# Altium PCB breakout_board.PcbDoc
Units mil, origin at the board's own origin, x right, y up, seen from the top; angles counter-clockwise.
Board outline 2000 x 900 mil, 2 copper layers (Top Layer, Bottom Layer), stack 61.855 mil thick; 38 components, 37 nets, 161 pads, 93 vias.
Unrouted connection lines stored in the file: 33.
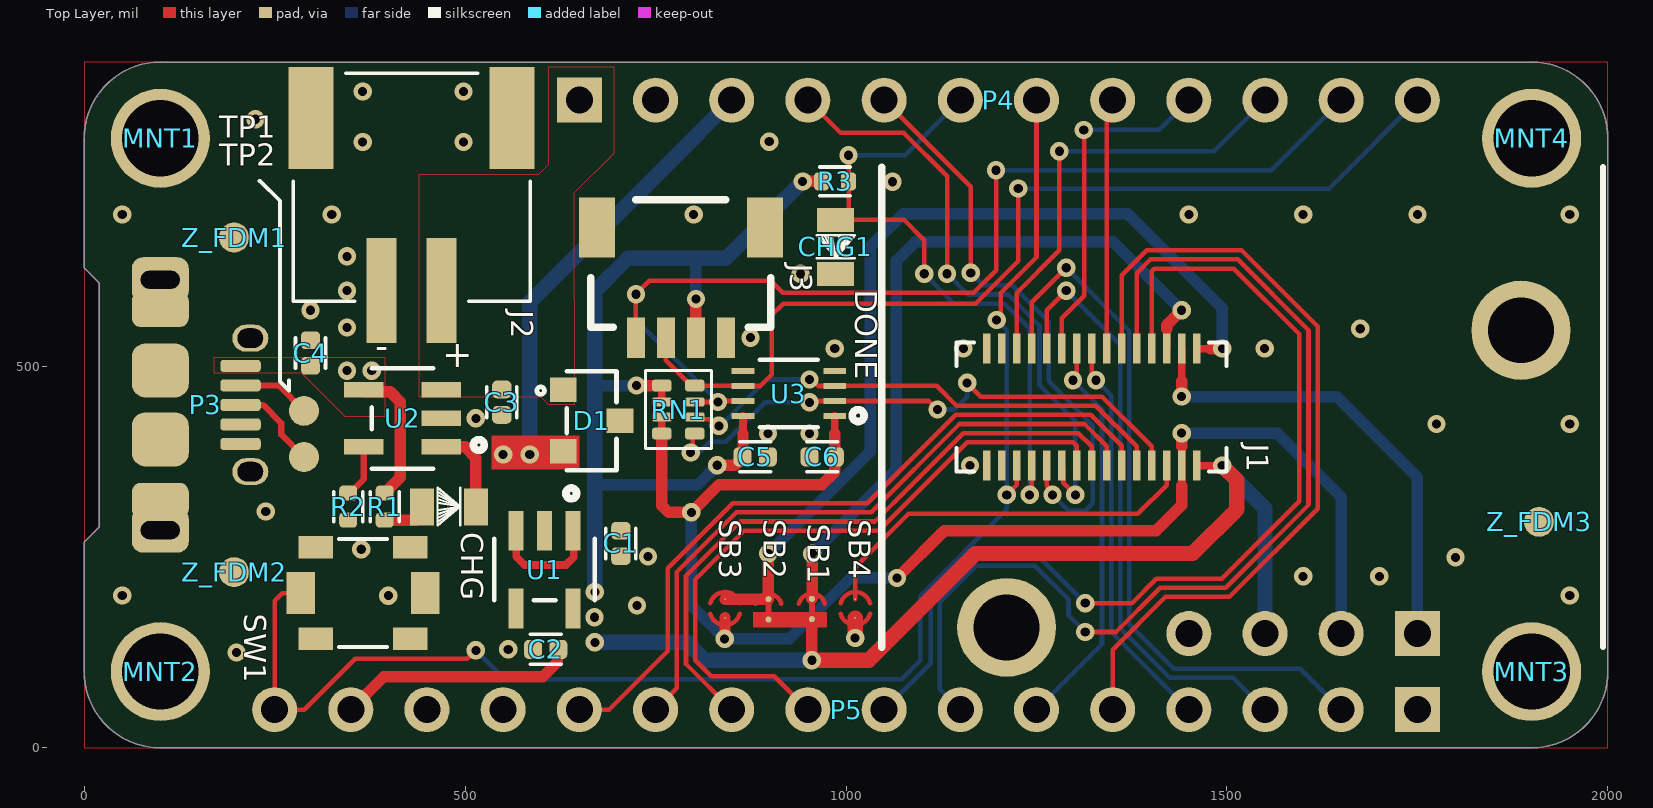
[diagram p0: Top Layer view]
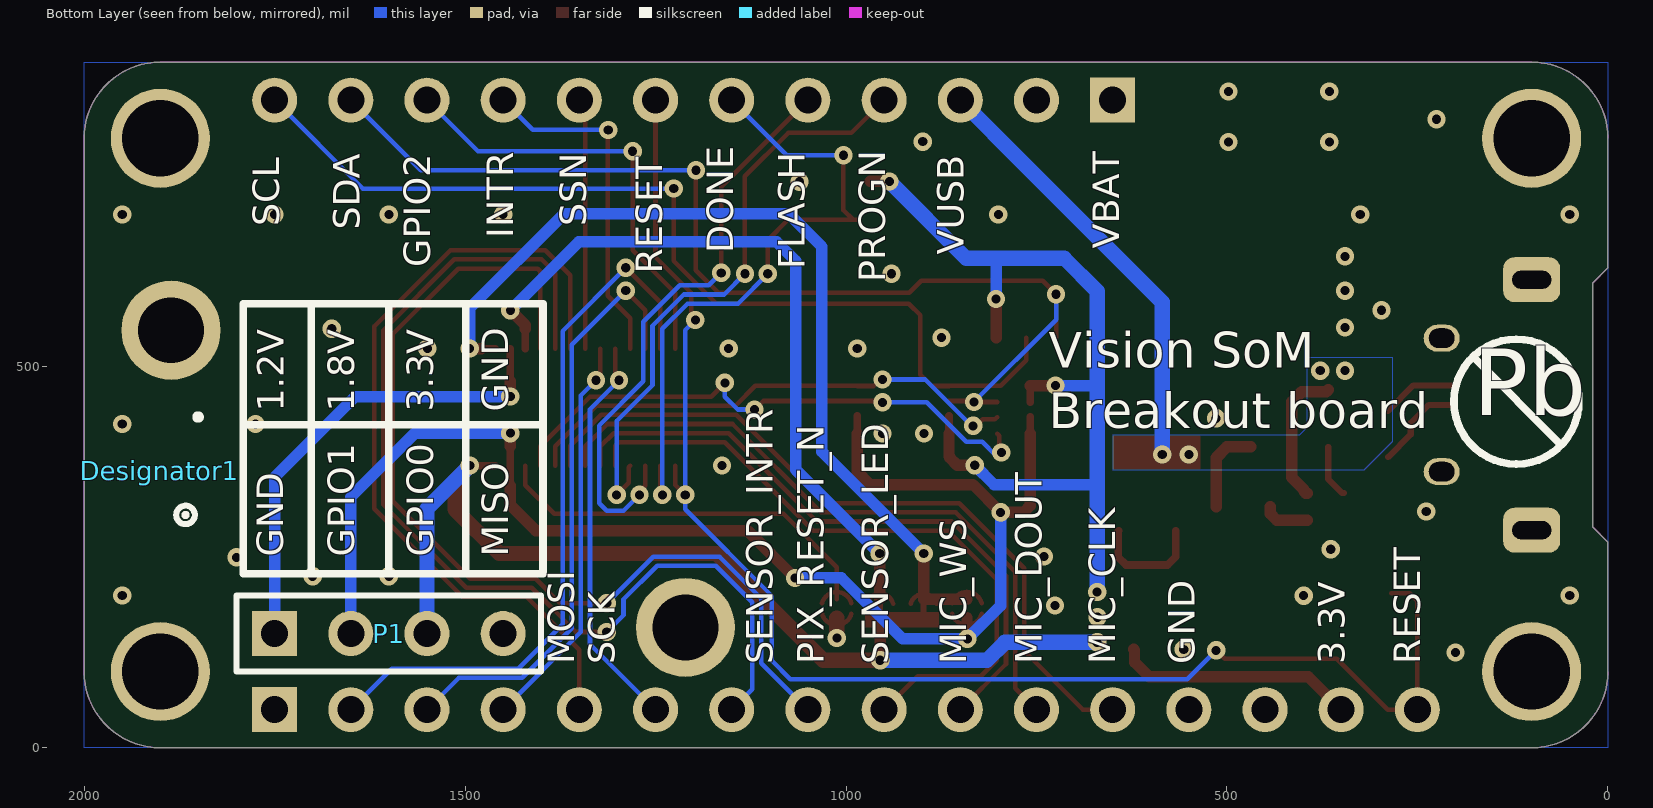
[diagram p1: Bottom Layer view, seen from below]

## Layer stack, top to bottom
Top Solder: solder mask 0.4, Solder Resist, Dk 3.5
Top Layer: signal copper 1.4
Dielectric 1: dielectric 59.0551, FR-4, Dk 4.8
Bottom Layer: signal copper 1.4
Bottom Solder: solder mask 0.4, Solder Resist, Dk 3.5

## Board outline
0,100 0,270 20,290 20,610 0,630 0,800 cw(c100,800) 100,900 1900,900 cw(c1900,800) 2000,800 2000,100 cw(c1900,100) 1900,0 100,0 cw(c100,100)

## Design rules (kind name [scope] priority, off if disabled: settings)
AssemblyTestPointUsage [All] p0: scope1count=1 scope1_0_kind=Board scope1_0_value=Board scope2count=1 scope2_0_kind=Board scope2_0_value=Board commentlength=0
AssemblyTestpoint [All] p0: scope1count=1 scope1_0_kind=Board scope1_0_value=Board scope2count=1 scope2_0_kind=Board scope2_0_value=Board commentlength=0
Clearance [All] p0: scope1count=1 scope1_0_kind=Board scope1_0_value=Board scope2count=1 scope2_0_kind=Board scope2_0_value=Board commentlength=0 gap=6
Clearance [All] p1: gap=6 ignorepadtopadclearanceinfootprint=FALSE except(8: Arc-Poly THPad-Poly; 10: Fill-Poly Poly-Poly Poly-Region Poly-Hole)
ComponentClearance ComponentClearance_Logo [All] p0: scope1count=1 scope1_0_kind=Component scope1_0_value=P1 scope2count=1 scope2_0_kind=Component scope2_0_value=SYM commentlength=0 gap=0 collisioncheckmode=3
ComponentClearance [All] p0: scope1count=1 scope1_0_kind=Board scope1_0_value=Board scope2count=1 scope2_0_kind=Board scope2_0_value=Board commentlength=0 gap=10 collisioncheckmode=3
ComponentClearance ComponentClearance_Logo [InComponent('P1') vs InComponent('SYM')] p1: gap=0 collisioncheckmode=3 verticalgap=0 showdistances=FALSE
ComponentClearance [All] p2: gap=10 collisioncheckmode=3 verticalgap=10 showdistances=FALSE
DiffPairsRouting [All] p0: scope1count=1 scope1_0_kind=Board scope1_0_value=Board scope2count=1 scope2_0_kind=Board scope2_0_value=Board commentlength=0
FabricationTestPointUsage [All] p0: scope1count=1 scope1_0_kind=Board scope1_0_value=Board scope2count=1 scope2_0_kind=Board scope2_0_value=Board commentlength=0 valid=0 allowmultiple=FALSE
FabricationTestpoint [All] p0: scope1count=1 scope1_0_kind=Board scope1_0_value=Board scope2count=1 scope2_0_kind=Board scope2_0_value=Board commentlength=0 side=3 testpointundercomponent=TRUE minsize=40 maxsize=100 preferedsize=60 minholesize=0 maxholesize=40 preferedholesize=32 testpointgrid=1
FanoutControl Fanout_BGA [All] p0 off: scope1count=1 scope1_0_kind=Board scope1_0_value=Board scope2count=1 scope2_0_kind=Board scope2_0_value=Board commentlength=69 // Protel DXP Scope 1 Expression Was: IsBGA   Fanout_BGA (Default Rule)
FanoutControl Fanout_LCC [All] p0 off: scope1count=1 scope1_0_kind=Board scope1_0_value=Board scope2count=1 scope2_0_kind=Board scope2_0_value=Board commentlength=69 // Protel DXP Scope 1 Expression Was: IsLCC   Fanout_LCC (Default Rule)
FanoutControl Fanout_SOIC [All] p0 off: scope1count=1 scope1_0_kind=Board scope1_0_value=Board scope2count=1 scope2_0_kind=Board scope2_0_value=Board commentlength=71 // Protel DXP Scope 1 Expression Was: IsSOIC   Fanout_SOIC (Default Rule)
FanoutControl Fanout_Small [All] p0 off: scope1count=1 scope1_0_kind=Board scope1_0_value=Board scope2count=1 scope2_0_kind=Board scope2_0_value=Board commentlength=84 // Protel DXP Scope 1 Expression Was: (CompPinCount < 5)   Fanout_Small (Default Rule)
FanoutControl Fanout_Default [All] p0: scope1count=1 scope1_0_kind=Board scope1_0_value=Board scope2count=1 scope2_0_kind=Board scope2_0_value=Board commentlength=30 // Fanout_Default (Default Rule)
Height [All] p0: scope1count=1 scope1_0_kind=Board scope1_0_value=Board scope2count=1 scope2_0_kind=Board scope2_0_value=Board commentlength=0
HoleSize [All] p0: scope1count=1 scope1_0_kind=Board scope1_0_value=Board scope2count=1 scope2_0_kind=Board scope2_0_value=Board commentlength=0 absolutevalues=TRUE maxlimit=100 minlimit=1 maxpercent=80.000 minpercent=20.000
HoleToHoleClearance [All] p0: scope1count=1 scope1_0_kind=Board scope1_0_value=Board scope2count=1 scope2_0_kind=Board scope2_0_value=Board commentlength=0
LayerPairs [All] p0: scope1count=1 scope1_0_kind=Board scope1_0_value=Board scope2count=1 scope2_0_kind=Board scope2_0_value=Board commentlength=0 enforce=TRUE
MinimumSolderMaskSliver [All] p0: scope1count=1 scope1_0_kind=Board scope1_0_value=Board scope2count=1 scope2_0_kind=Board scope2_0_value=Board commentlength=0
MinimumSolderMaskSliver [All] p1: minsoldermaskwidth=2
NetAntennae [All] p0: scope1count=1 scope1_0_kind=Board scope1_0_value=Board scope2count=1 scope2_0_kind=Board scope2_0_value=Board commentlength=0
PasteMaskExpansion [All] p0: scope1count=1 scope1_0_kind=Board scope1_0_value=Board scope2count=1 scope2_0_kind=Board scope2_0_value=Board commentlength=0 expansion=0
PlaneClearance [All] p0: scope1count=1 scope1_0_kind=Board scope1_0_value=Board scope2count=1 scope2_0_kind=Board scope2_0_value=Board commentlength=0 clearance=20
PlaneConnect [All] p0: scope1count=1 scope1_0_kind=Board scope1_0_value=Board scope2count=1 scope2_0_kind=Board scope2_0_value=Board commentlength=0 planeconnectstyle=Relief reliefexpansion=20 reliefentries=4 reliefconductorwidth=10 reliefairgap=10
PolygonConnect PolygonConnect_PWR [All] p0 off: scope1count=1 scope1_0_kind=Board scope1_0_value=Board scope2count=1 scope2_0_kind=Board scope2_0_value=Board commentlength=69 connectstyle=Direct reliefconductorwidth=10 reliefentries=4 polygonreliefangle="90 Angle" // Protel DXP Scope 1 Expression Was: InNet('VUSB') or InNet('VBAT')
PolygonConnect [All] p0: scope1count=1 scope1_0_kind=Board scope1_0_value=Board scope2count=1 scope2_0_kind=Board scope2_0_value=Board commentlength=0 connectstyle=Relief reliefconductorwidth=8 reliefentries=4 polygonreliefangle="90 Angle"
PolygonConnect PolygonConnect_PWR [InNet('VUSB') or InNet('VBAT')] p1: connectstyle=Direct reliefconductorwidth=10 reliefentries=4 polygonreliefangle="90 Angle" airgapwidth=10
PolygonConnect [All] p2: thpad.connectstyle=Relief thpad.reliefconductorwidth=8 thpad.reliefentries=4 thpad.polygonreliefangle="90 Angle" thpad.airgapwidth=8 smdpad.connectstyle=Direct smdpad.reliefconductorwidth=10 smdpad.reliefentries=4 smdpad.polygonreliefangle="90 Angle" smdpad.airgapwidth=10 via.connectstyle=Direct via.reliefconductorwidth=10 via.reliefentries=4 via.polygonreliefangle="90 Angle" via.airgapwidth=10
RoomDefinition breakout_board [All] p0 off: scope1count=1 scope1_0_kind=ComponentClass scope1_0_value=breakout_board scope2count=1 scope2_0_kind=Board scope2_0_value=Board commentlength=0 region_x1=82350000 region_y1=650000 region_x2=88400000 region_y2=2400000 confinementstyle=ConfineIn
RoomDefinition breakout_board [InComponentClass('breakout_board')] p1 off: confinementstyle=ConfineIn formatcopy=TRUE lockcomponents=FALSE outline 7110,-1635 7715,-1635 7715,-1460 7110,-1460
RoutingCorners [All] p0: scope1count=1 scope1_0_kind=Board scope1_0_value=Board scope2count=1 scope2_0_kind=Board scope2_0_value=Board commentlength=0 cornerstyle=45-Degree minsetback=100 maxsetback=100
RoutingLayers [All] p0: scope1count=1 scope1_0_kind=Board scope1_0_value=Board scope2count=1 scope2_0_kind=Board scope2_0_value=Board commentlength=0 top layer=Automatic bottom layer=Automatic
RoutingPriority [All] p0: scope1count=1 scope1_0_kind=Board scope1_0_value=Board scope2count=1 scope2_0_kind=Board scope2_0_value=Board commentlength=0
RoutingTopology [All] p0: scope1count=1 scope1_0_kind=Board scope1_0_value=Board scope2count=1 scope2_0_kind=Board scope2_0_value=Board commentlength=0 topology=Shortest
RoutingVias [All] p0: scope1count=1 scope1_0_kind=Board scope1_0_value=Board scope2count=1 scope2_0_kind=Board scope2_0_value=Board commentlength=0 holewidth=12 width=24 viastyle="Through Hole" minholewidth=10 minwidth=20 maxholewidth=28 maxwidth=50
RoutingVias [All] p1: holewidth=12 width=24 viastyle="Through Hole" minholewidth=10 minwidth=20 maxholewidth=28 maxwidth=50
ShortCircuit [All] p0: scope1count=1 scope1_0_kind=Board scope1_0_value=Board scope2count=1 scope2_0_kind=Board scope2_0_value=Board commentlength=0 allowed=FALSE
SilkToBoardRegionClearance [All] p0: scope1count=1 scope1_0_kind=Board scope1_0_value=Board scope2count=1 scope2_0_kind=Board scope2_0_value=Board commentlength=0
SilkToSilkClearance [All] p0: scope1count=1 scope1_0_kind=Board scope1_0_value=Board scope2count=1 scope2_0_kind=Board scope2_0_value=Board commentlength=0
SilkToSilkClearance [All] p1: silktosilkclearance=3
SilkToSolderMaskClearance [All] p0 off: scope1count=1 scope1_0_kind=Board scope1_0_value=Board scope2count=1 scope2_0_kind=Board scope2_0_value=Board commentlength=44 // Protel DXP Scope 1 Expression Was: IsPad
SilkToSolderMaskClearance [IsPad] p1: minsilkscreentomaskgap=0.5 clearancetoexposedcopper=TRUE
SolderMaskExpansion [All] p0: scope1count=1 scope1_0_kind=Board scope1_0_value=Board scope2count=1 scope2_0_kind=Board scope2_0_value=Board commentlength=0 expansion=4
SolderMaskExpansion [All] p1: expansion=4 istentingtop=FALSE
UnRoutedNet [All] p0: scope1count=1 scope1_0_kind=Board scope1_0_value=Board scope2count=1 scope2_0_kind=Board scope2_0_value=Board commentlength=0
UnpouredPolygon [All] p0: scope1count=1 scope1_0_kind=Board scope1_0_value=Board scope2count=1 scope2_0_kind=Board scope2_0_value=Board commentlength=0
Width [All] p0: scope1count=1 scope1_0_kind=Board scope1_0_value=Board scope2count=1 scope2_0_kind=Board scope2_0_value=Board commentlength=0 maxlimit=40 minlimit=6 preferedwidth=10
Width [All] p1: maxlimit=40 minlimit=6 preferedwidth=10 minimp=50.000000 maximp=50.000000 favimp=50.000000
26 further rules are at their usual default settings.

## Components (designator, comment, footprint, x,y, rotation, side; value= is the part's Value field where it differs from the comment)
C1 "4.7uF" CAPC1005X61USR 704.47,268.19 r270 top
C2 "4.7uF" CAPC1005X61USR 605.86,129.19 r180 top
C3 "4.7uF" CAPC1005X61USR 548.24,453.63 r270 top
C4 "4.7uF" CAPC1005X61USR 297.18,518.11 r90 top
C5 "0.1uF" CAPC1005X61USR 880.77,381.87 r0 top
C6 "0.1uF" CAPC1005X61USR 968.72,381.87 r180 top
CHG "GREEN" LED_0805 478.75,316.16 r180 top
CHG1 "DONE" LED_0805 986.14,657.55 r90 top
D1 "BAT54C-E3-08" SOT-23 666.23,429.45 r270 top
Designator1 "Comment" WEEE_Minimum 1901,364 r180 bottom locked
J1 "DF23C-30DP-0.5V(92)" SOM-SMD 1662.93,447.18 r270 top locked
J2 "Li Ion" JST_S2B-PH-SM4-TB(LF)(SN) 430,600 r180 top locked
J3 "" 1X04_1MM_RA 783.33,538.38 r180 top
MNT1 "MOUNTING HOLE" MNT620-275N#1 100,800 r90 top locked
MNT2 "MOUNTING HOLE" MNT620-275N#1 100,100 r90 top
MNT3 "MOUNTING HOLE" MNT620-275N#2 2180.76,-205.11 r90 top
MNT4 "MOUNTING HOLE" MNT620-275N#3 1932.85,-199.41 r90 top
P1 "Header 4" HDR1X4 1750,150 r180 bottom
P3 "0475890001" *MOLEX_0475890001 100,450 r270 top locked
P4 "Header 12" HDR1X12 650,850 r0 top locked
P5 "Header 16" HDR1X16 1000,50 r180 top locked
R1 "1K" RESC1005X40USR 394.55,316.65 r270 top
R2 "10K" RESC1005X40USR 346.69,316.65 r90 top
R3 "1K" RESC1005X40USR 985.62,743.39 r0 top
RN1 "47K" RESCAXS50P100X200X45-8NA 779.98,443.97 r0 top
SB1 "Solderbridge" Solderbridge_Shorted 955.2,182.2 r90 top net-tie
SB2 "Solderbridge" Solderbridge_Shorted 898.2,181.8 r90 top net-tie
SB3 "Solderbridge" Solderbridge#1 841.2,182.8 r90 top
SB4 "Solderbridge" Solderbridge#2 1012.2,182.8 r90 top
SW1 "PTS820 J25K SMTR LFS" PTS820J25MSMTRLFS 366,203 r0 top
TP1 "TEST POINT" "TP 1mm" 288.58,442.3 r90 top
TP2 "TEST POINT" "TP 1mm" 288.58,381.58 r90 top
U1 "SPX3819M5-L-3-3/TR" SOT-23-5 604.38,233.9 r270 top
U2 "MCP73831T-2ACI/OT" SOT-23-5 418.01,432.4 r180 top
U3 "TC7WPB9307FK" 8-VFSOP 925,465 r180 top
Z_FDM1 "FCM" FID100X250N 196.85,669.29 r90 top
Z_FDM2 "FCM" FID100X250N 196.85,230.11 r90 top
Z_FDM3 "FCM" FID100X250N 1909.61,296.17 r90 top

## Footprints (in the part's own frame and the unit in brackets; to place one, negate y for a bottom-side part, rotate by r counter-clockwise, add the part's x,y. Pads: shape width x height; smd on the part's side, far side on the other; paste and mask are expansions set on the pad)
1X04_1MM_RA [mm] "1X04_1MM_RA"
  rect 0.6x1.35 smd: 1(-1.5,0) 2(-0.5,0) 3(0.5,0) 4(1.5,0)
  rect 1.2x2 smd: NC1(2.8,-3.675) NC2(-2.8,-3.675)
  silkscreen extent -3,-4.6 3,-0.35
8-VFSOP [mm]
  rect 0.756x0.199 smd paste+0 mask+0: 1(-1.528,0.75) 2(-1.528,0.25) 3(-1.528,-0.25) 4(-1.528,-0.75) 5(1.528,-0.75) 6(1.528,-0.25) 7(1.528,0.25) 8(1.528,0.75)
  silkscreen extent -2.51,-1.13 0.97,1.13
*MOLEX_0475890001 [mm]
  rrect50% 0.4x1.35 smd mask+0: 1(-1.3,2.675) 2(-0.65,2.675) 3(0,2.675) 4(0.65,2.675) 5(1.3,2.675)
  rrect50% 1.175x1.9 smd: SH(-3.187,0) SH_3(3.187,0)
  rrect50% 1.8x1.9 smd: SH_1(1.15,0) SH_2(-1.15,0)
  oval 0.9x1.2 hole 0.65 slot 0.85 at 90 deg: SH_4(-2.225,3) SH_5(2.225,3)
  rrect50% 1.5x1.9 hole 0.6 slot 1.3 at 90 deg: SH_6(-4.175,0) SH_7(4.175,0)
CAPC1005X61USR [mm] "Capacitor, Chip; 1.016 mm L X 0.508 mm W X 0.61 mm H body"
  rrect51% 0.59x0.64 smd: 1(-0.425,0) 2(0.425,0)
  silkscreen extent -0.51,-0.5 0.51,0.5
FID100X250N [mm]
  round 1 smd paste-0.5 mask+0: 1(0.01,0)
HDR1X4 [mm] "Connector; Header; 4 Position"
  rect 1.5x1.5 hole 0.9: 1(0,0)
  round 1.5 hole 0.9: 2(2.54,0) 3(5.08,0) 4(7.62,0)
  silkscreen extent -1.27,-1.27 8.89,1.27
HDR1X12 [mm] "Connector; Header; 12 Position"
  rect 1.5x1.5 hole 0.9: 1(0,0)
  round 1.5 hole 0.9: 2(2.54,0) 3(5.08,0) 4(7.62,0) 5(10.16,0) 6(12.7,0) 7(15.24,0) 8(17.78,0) 9(20.32,0) 10(22.86,0) 11(25.4,0) 12(27.94,0)
HDR1X16 [mm] "Connector; Header; 16 Position"
  rect 1.5x1.5 hole 0.9: 1(-19.05,0)
  round 1.5 hole 0.9: 2(-16.51,0) 3(-13.97,0) 4(-11.43,0) 5(-8.89,0) 6(-6.35,0) 7(-3.81,0) 8(-1.27,0) 9(1.27,0) 10(3.81,0) 11(6.35,0) 12(8.89,0) 13(11.43,0) 14(13.97,0) 15(16.51,0) 16(19.05,0)
JST_S2B-PH-SM4-TB(LF)(SN) [mm]
  rect 1x3.5 smd: 1(-1,0) 2(1,0)
  rect 1.5x3.4 smd: S1(-3.35,-5.75) S2(3.35,-5.75)
  silkscreen extent -3.95,-7.25 3.95,0.35
LED_0805 [mm]
  rect 0.8x1.245 smd paste+0 mask+0: 1(0.9,0) 2(-0.9,0)
  silkscreen extent -0.38,-0.65 0.38,0.62
MNT620-275N#1 [mil]
  round 130 hole 100: 1(0,0)
MNT620-275N#2 [mil]
  round 130 hole 100: 1(305.11,280.76)
MNT620-275N#3 [mil]
  round 130 hole 100: 1(999.41,32.85)
PTS820J25MSMTRLFS [mm]
  rect 0.95x1.4 smd: 1(-2.075,0) 2(2.075,0)
  rect 1.15x0.75 smd: G1(-1.575,-1.525) G2(1.575,-1.525) G3(1.575,1.525) G4(-1.575,1.525)
  silkscreen extent -0.8,-1.8 0.8,1.8
RESC1005X40USR [mm] "Resistor, Chip; 1.00 mm L X 0.50 mm W X 0.40 mm H body"
  rrect52% 0.5x0.6 smd: 1(-0.45,0) 2(0.45,0)
  silkscreen extent -0.5,-0.48 0.5,0.48
RESCAXS50P100X200X45-8NA [mm] "2 Side, Convex"
  rrect50% 0.65x0.4 smd mask+0: 1(-0.55,0.8) 4(-0.55,-0.8) 5(0.55,-0.8) 8(0.55,0.8)
  rrect50% 0.65x0.3 smd mask+0: 2(-0.55,0.25) 3(-0.55,-0.25) 6(0.55,-0.25) 7(0.55,0.25)
  silkscreen extent -1.1,-1.3 1.1,1.3
Solderbridge#1 [mil]
  round 2 smd paste-393.7: 1(-12.3,0) 2(12.3,0)
  Top Layer lines w6: -7.07,19.26 ccw(c-1.67,0) -21.67,0 ccw(c-1.67,0) -7.07,-19.26 ; 7.07,19.26 cw(c1.67,0) 12.3,-16.94 cw(c1.67,0) 7.07,-19.26
Solderbridge#2 [mil]
  round 2 smd paste-393.7: 1(-12.3,0) 2(12.3,0)
  Top Layer lines w6: -7.07,19.26 ccw(c-1.67,0) -21.67,0 ccw(c-1.67,0) -12.3,-16.94 ccw(c-1.67,0) -7.07,-19.26 ; 7.07,19.26 cw(c1.67,0) 21.67,0 cw(c1.67,0) 7.07,-19.26
Solderbridge_Shorted [mm]
  round 0.2 smd paste-10: 1(-0.338,0) 2(0.338,0)
  Top Layer lines w0.152: -0.178,0.431 ccw(c-0.068,0) -0.178,-0.431 ; 0.178,0.431 cw(c0.068,0) 0.178,-0.431
  Top Layer lines w0.203: -0.338,0 0.338,0
SOM-SMD [mm]
  rect 1x0.25 smd mask+0: 1(-1.95,-5.15) 2(1.95,-5.15) 3(-1.95,-5.65) 4(1.95,-5.65) 5(-1.95,-6.15) 6(1.95,-6.15) 7(-1.95,-6.65) 8(1.95,-6.65) 9(-1.95,-7.15) 10(1.95,-7.15) 11(-1.95,-7.65) 12(1.95,-7.65) 13(-1.95,-8.15) 14(1.95,-8.15) 15(-1.95,-8.65) 16(1.95,-8.65) 17(-1.95,-9.15) 18(1.95,-9.15) 19(-1.95,-9.65) 20(1.95,-9.65) 21(-1.95,-10.15) 22(1.95,-10.15) 23(-1.95,-10.65) 24(1.95,-10.65) 25(-1.95,-11.15) 26(1.95,-11.15) 27(-1.95,-11.65) 28(1.95,-11.65) 29(-1.95,-12.15) 30(1.95,-12.15)
  round 3.302 hole 2.2: M1(-2.562,5.662) M2(7.344,-11.483)
  silkscreen extent -8,-15.65 8,8.4
SOT-23 [mil]
  rect 32x35 smd paste+0 mask+0: 1(-40.35,-37.2) 2(40.35,-37.2) 3(0,37.2)
  silkscreen extent -65,-72 65,33
SOT-23-5 [mil]
  rect 52x20 smd paste+0 mask+0: 1(-51,37.4) 2(-51,0) 3(-51,-37.4) 4(51,-37.4) 5(51,37.4)
  silkscreen extent -107,-66 41,66
"TP 1mm" [mm] "1 mm Probe Pad"
  round 1 smd: 1(0,0)
WEEE_Minimum [mil]
  silkscreen extent 22,-71 54,74

## Part data
C1 C2 C3 C4: library part "CAP NP"
C5 C6: library part Cap_100nF_X7R_10%_0402, "CAP CER 0.1UF 6.3V 0402"
CHG CHG1: library part LED_1, "Avago HSMG-C170"
D1: library part BAT54C, "DIODE ARRAY SCHOTTKY 30V SOT23"
J1: "CONN PLUG 30POS SMD GOLD"
J2: library part S2B-PH-SM4-TB(LF)(SN), "CONN HEADER SMD R/A 2POS 2MM"
J3: library part QWIIC_CONNECTORJS-1MM, "CONN HEADER SMD R/A 4POS 1MM"
MNT1 MNT2 MNT3 MNT4: library part MNT_1
P1: "Header, 4-Pin"
P3: "CONN RCPT MICRO USB AB 5P SMD RA"
P4: "Header, 12-Pin"
P5: "Header, 16-Pin"
R1 R3: library part R_SH, "RESISTOR 1K OHM 1% 0.0625W 0402"
R2: library part R_SH, "RESISTOR 10K OHM 1% 0.0625W 0402"
RN1: library part EXB-N8V473JX, "RES ARRAY 4 RES 10K OHM 0804"
SB1 SB2: library part "Solderbridge Shorted", "Shorted Solderbridge"
SW1: library part SPST_NO, "SWITCH TACTILE SPST-NO 0.05A 12V"
U1: "IC REG LINEAR 3.3V 500MA SOT23-5"
U2: library part PM-BM-MCP73831-SOT5, "Miniature Single-Cell, Fully Integrated Li-Ion, Li-Polymer Charge Management Controller, 4.2V, 5-Pin SOT-23, Industrial Temperature, Tape and Reel"
U3: "X34 GENERAL-PURPOSE BUS SWITCH L"

## Via types
v1: diameter 24, hole 12, Top Layer to Bottom Layer, tented both sides, 92 vias
v2: diameter 24, hole 12, Top Layer to Bottom Layer, 1 vias

## Nets (pads, with @x,y where several pads share a name; then routed paths per layer and width w, separated by ;. In a path a pad name is that pad's centre, name@x,y a point inside that pad or via, vN(x,y) a via of type N, cw(c..) or ccw(c..) an arc to the next point about the centre after c; other vN are vias at no path point)
DONE: CHG1.1 J1.24 P4.6 R3.2 | length 864.1
  Top Layer w6: CHG1.1 CHG1.1@990.59,692.98 ; v1(1003.33,777.67) R3.2 1003.33,705.73 CHG1.1@990.59,692.98 ; v1(1102.65,622.12) 1102.65,666.38 1076.06,692.98 CHG1.1@990.59,692.98 ; v1(1241,332) 1243.64,334.64 J1.24
  Bottom Layer w6: v1(1003.33,777.67) 1077.67,777.67 P4.6 ; v1(1102.65,622.12) 1141.77,583 1208.03,583 1241,550.03 v1(1241,332)
GND: C1.2 C2.2 C3.2 C4.2 C5.2 C6.2 CHG1.2 J1.27 J1.28 J1.29 J1.30 J2.2 J2.S1 J2.S2 J3.1 MNT1.1 MNT2.1 MNT3.1 MNT4.1 P1.4 P3.5 P3.SH P3.SH_1 P3.SH_2 P3.SH_3 P3.SH_4 P3.SH_5 P3.SH_6 P3.SH_7 P5.1 P5.13 R2.1 SB4.1 SW1.2 U1.2 U2.2 U3.4 U3.5 | length 26.6
  Top Layer w20: v2(1012,144) 1012,160.93 1012.2,161.13 SB4.1
  other v1: 200,125 556.64,129.19 725.64,186.73 50,200 399.37,199.67 1950,200 1600,225 1700,225 1800,250 740.11,251 363.85,260.55 238.38,310.06 1162.83,370.54 897.5,412.47 951.99,412.47 1775,425 1950,425 514.19,432.4 985.15,523.95 1154,524.03 1549.51,523.95 874.75,538.39 1675,550 345,551.58 297.18,574.36 345,600 940.2,622.12 345,645.03 50,700 325,700 800,700 1450,700 1600,700 1750,700 1950,700 1061,743 365.6,795 497.85,795 899.32,795.56 225,825 365.6,861.48 497.85,861.48
GPIO_0: J1.21 P5.3 | length 793.4
  Top Layer w6: J1.21 1263.33,574.33 v1(1289,600)
  Bottom Layer w6: v1(1289,600) 1360,529 1360,157.03 1425.03,92 1508,92 P5.3
GPIO_1: J1.23 P5.2 | length 951.6
  Top Layer w6: J1.23 1243.64,584.64 v1(1289,630)
  Bottom Layer w6: v1(1289,630) 1372,547 1372,162 1430,104 1596,104 P5.2
GPIO_2: J1.25 P4.10 | length 580
  Top Layer w6: J1.25 J1.25 1224,597 1280,653 v1(1280,783)
  Bottom Layer w6: v1(1280,783) 1483,783 P4.10
HOST_INTR: J1.19 P4.9 | length 453.6
  Top Layer w6: J1.19 1283.01,563.82 1312.49,593.29 1312.49,810.51 v1(1312,811)
  Bottom Layer w6: v1(1312,811) 1411,811 P4.9
HOST_MISO: J1.15 P5.4 | length 526.8
  Top Layer w6: J1.15 1322.38,488 v1(1328,482.39)
  Bottom Layer w6: v1(1328,482.39) 1348,462.39 1348,152 P5.4
HOST_MOSI: J1.11 P5.5 | length 1072.2
  Top Layer w6: P5.5 1350,128.86 1419.14,198 1503.24,198 1619.03,313.79 1619.03,553.04 1519.07,653 1394.7,653 1361.75,620.06 J1.11
HOST_SCK: J1.17 P5.6 | length 527.3
  Top Layer w6: v1(1298,482.39) 1298,487.26 1302.7,491.95 J1.17
  Bottom Layer w6: P5.6 1336,136 1336,444.39 v1(1298,482.39)
HOST_SSN: J1.13 P4.8 | length 329.3
  Top Layer w6: J1.13 J1.13 1342.15,842.15 P4.8
LDO_EN_N: J1.6 SB4.2 | length 520.9
  Top Layer w6: SB4.2 1012.2,204.47 1012.2,237.2 1082,307 1383,307 1420.81,344.81 J1.6
MIC_CLK: J1.12 P5.12 | length 978.5
  Top Layer w6: P5.12 689,50 766,127 766,235.77 851.23,321 1028,321 1144,437 1321,437 1361.75,396.25 J1.12
MIC_DOUT: J1.14 P5.11 | length 874.5
  Top Layer w6: P5.11 778,78 778,230.8 856.2,309 1033,309 1149,425 1313,425 1342.07,395.93 J1.14
MIC_WS: J1.16 P5.10 | length 843
  Top Layer w6: P5.10 790,110 790,225.83 861.17,297 1038,297 1086.44,345.44 1154,413 1305,413 1322.38,395.62 J1.16
NetC1_1: C1.1 D1.3 U1.1 U1.3 | length 153.3
  Top Layer w10: U1.3 567,251 578,240 632.5,240 642.5,250 642.5,284.18 U1.1
NetCHG_1: CHG.1 R1.2 | length 61
  Top Layer w15: R1.2 434.84,298.93 443.32,307.41 CHG.1
NetCHG_2: CHG.2 U2.1 | length 115.7
  Top Layer w15: U2.1 500,395 514.19,380.81 CHG.2
NetP3_2: P3.2 TP1.1 | length 97.1
  Top Layer w8: P3.2 255.29,475.59 TP1.1
NetP3_3: P3.3 TP2.1 | length 120.3
  Top Layer w8: P3.3 235,450 258.79,426.21 258.79,411.37 TP2.1
NetR2_2: R2.2 U2.5 | length 70.2
  Top Layer w8: R2.2 348.66,334.36 367.01,352.72 U2.5
PIX_RESET_N: J1.7 P5.8 | length 1310.7
  Top Layer w6: v1(1314,189.88) 1375.31,189.88 1407.42,222 1493.3,222 1595.03,323.73 1595.03,543.1 1509.13,629 1404.64,629 1401.12,625.49 J1.7
  Bottom Layer w6: P5.8 1111,111 1111,196.03 1165.97,251 1252.88,251 v1(1314,189.88)
PROG_FLASH: J1.22 P4.5 | length 772.1
  Top Layer w6: P4.5 1163.74,736.26 v1(1163.74,623.41) ; J1.22 1263.33,343.83 1271,336.16 v1(1271,332)
  Bottom Layer w6: v1(1163.74,623.41) 1180.15,607 1217.97,607 1266,558.97 1266,480.97 1324,422.97 1324,321 1314,311 1292,311 v1(1271,332)
PROGN: J1.20 P4.4 | length 789.1
  Top Layer w6: P4.4 993,807 1076,807 1132.65,750.35 v1(1132.65,622.12) ; J1.20 1284.93,368.49 1284.93,348.07 v1(1301,332)
  Bottom Layer w6: v1(1132.65,622.12) 1159.77,595 1213,595 1254,554 1254,476 1301,429 v1(1301,332)
RESET_N: J1.26 P4.7 P5.16 SW1.1 | length 1941.5
  Top Layer w6: SW1.1 260,203 250,193 P5.16 289.08,50 356.08,117 503.14,117 514.05,127.91 v1(514.19,127.91) ; v1(1197.74,561.57) 1201.25,565.08 1203,565.08 1203,597 1250,644 P4.7 ; v1(1211,332) 1223.96,344.96 J1.26
  Bottom Layer w6: v1(514.19,127.91) 552.1,90 1073,90 1097.2,114.2 1097.2,199.2 1211,313 v1(1211,332) 1211,548.3 v1(1197.74,561.57)
SCL: J3.4 P4.11 RN1.7 U3.7 | length 1427.5
  Top Layer w6: J3.4 v1(724.27,595.27) 742,613 901.44,613 917.07,597.37 1167.4,597.37 1197,626.97 v1(1197,758) ; RN1.7 801.73,453.91 831.91,453.91 833.16,455.16 U3.7
  Bottom Layer w6: v1(724.27,595.27) 724.27,561.73 v1(832,454) ; v1(1197,758) 1558,758 P4.11
SDA: J3.3 P4.12 RN1.8 U3.6 | length 1286.8
  Top Layer w6: J3.3 763.64,508.54 797.02,475.15 864.54,475.15 U3.6 887.37,474.84 902.27,489.74 902.27,567.65 917.62,583 1170,583 1226,639 v1(1226,734)
  Bottom Layer w6: v1(1226,734) 1634,734 P4.12
SENSOR_INTR: J1.9 P5.7 | length 1373.2
  Top Layer w6: v1(1314,152) 1354.39,152 1412.39,210 1498.27,210 1607.03,318.76 1607.03,548.07 1514.1,641 1399.67,641 1381.44,622.77 J1.9
  Bottom Layer w6: P5.7 1123.01,76.99 1123.01,191.07 1170.94,239 1247.91,239 1292,194.91 1292,174 v1(1314,152)
SENSOR_LED: J1.18 P5.9 | length 883.9
  Top Layer w6: P5.9 906,94 823,94 802,115 802,220.86 866.14,285 1043.03,285 1159.03,401 1298,401 1302.7,396.3 J1.18
SOM_SCL: J1.8 RN1.5 U3.2 | length 752.5
  Top Layer w6: v1(796.05,387.55) 798.84,390.34 798.84,409.68 RN1.5 ; v1(951.99,453.38) 953.77,455.16 U3.2 1108.84,455.16 v1(1120,444) ; v1(1159,479) 1177,461 1336,461 1401.12,395.88 J1.8
  Bottom Layer w6: v1(796.05,387.55) 801.02,387.55 804.21,384.35 821.41,401.55 842.24,401.55 894.07,453.38 v1(951.99,453.38) ; v1(1120,444) 1142,444 1159,461 v1(1159,479)
SOM_SDA: J1.10 RN1.6 U3.3 | length 671.4
  Top Layer w6: RN1.6 804.54,431.22 820.64,431.22 829.31,422.55 v1(833.16,422.55) ; v1(951.99,483.38) 955.28,483.38 963.82,474.84 U3.3 985.31,475 1119,475 1145,449 1328,449 1381.42,395.58 J1.10
  Bottom Layer w6: v1(833.16,422.55) 834.68,424.08 836.6,424.08 895.91,483.38 v1(951.99,483.38)
VBAT: C3.1 D1.1 J2.1 P4.1 U2.3
VDD12: J1.3 P1.1 | length 621.4
  Top Layer w10: 1440.49,480.97 J1.3
  Top Layer w15: v1(1440.49,461) 1440.49,480.97
  Bottom Layer w15: v1(1440.49,461) 1644.11,461 1750,355.11 P1.1
VDD18: C6.1 J1.4 P1.2 RN1.3 RN1.4 SB3.1 U3.1 | length 1844.4
  Top Layer w10: RN1.4 RN1.3 ; 985.15,412.43 U3.1 ; 1440.49,343.91 J1.4 1440.49,395.58
  Top Layer w15: RN1.4 758.33,317.79 767.11,309 v1(797.02,309) 833.46,345.44 968.41,345.44 985.15,362.18 985.15,381.57 C6.1 985.15,382.17 985.15,412.43 ; v1(840.75,143) 841.2,143.45 SB3.1 ; v1(1067,223) 1129,285 1407,285 1440.49,318.49 1440.49,343.91 ; 1440.49,395.58 v1(1440.49,413)
  Bottom Layer w15: v1(797.02,309) 797.02,186.73 v1(840.75,143) 925.89,143 1005.89,223 v1(1067,223) ; v1(1440.49,413) 1566.02,413 1650,329.02 P1.2
VDD33: C2.1 C5.1 J1.2 J3.2 P1.3 P5.15 R3.1 RN1.1 RN1.2 SB1.1 SB2.1 U1.5 U3.8 | length 2874.8
  Top Layer w10: RN1.2 RN1.1 ; 864.85,412.47 U3.8 ; J1.2 v1(1493.75,370.41)
  Top Layer w15: P5.15 393.03,93.03 601.77,93.03 621.31,112.57 621.31,127.91 C2.1 ; v1(725,475.47) RN1.1 ; J3.2 v1(803,589) ; v1(831.11,370.83) 853.99,370.83 864.04,380.88 C5.1 864.85,382.68 864.85,412.47 ; v1(943.09,743.39) R3.1 ; v1(955.16,115) SB1.1
  Top Layer w20: v1(955.16,115) 1029.97,115 1169.97,255 1455,255 1513,313 1513,351.16 v1(1493.75,370.41) ; SB1.1 SB1.1
  Bottom Layer w15: 670.38,345.44 805.72,345.44 v1(831.11,370.83) ; 670.38,475.47 v1(725,475.47) ; v1(803,589) 803.02,642.55
  Bottom Layer w20: v1(670.38,204.4) 670.38,345.44 670.38,475.47 670.38,599.38 713.55,642.55 803.02,642.55 842.25,642.55 v1(943.09,743.39) ; v1@670.56,138.25 v1(670.38,138.43) 791.57,138.43 815.07,114.93 955.09,114.93 v1(955.16,115) ; v1(1493.75,370.41) 1550,314.16 P1.3
  other v1: 670,171.41
VDD_IR_LED: J1.5 SB1.2 | length 970
  Top Layer w10: J1.5 1420.81,550.03
  Top Layer w15: SB1.2 955.65,195.95 v1(955.65,254.8) ; 1420.81,550.03 1420.81,554.64 v1(1440.49,574.33)
  Bottom Layer w15: v1(955.65,254.8) 1065.83,364.98 1065.83,639 1090.83,664 1350.82,664 v1(1440.49,574.33)
VDDIO: J1.1 SB2.2 SB3.2 | length 1193.4
  Top Layer w10: J1.1 1479,523.95
  Top Layer w15: SB3.2 858.14,195.1 SB2.2 898.2,254.8 v1(898,255) ; 1479,523.95 v1(1494,523.95)
  Bottom Layer w15: v1(898,255) 1031.81,388.81 1031.81,657.81 1075,701 1369.81,701 1494,576.81 v1(1494,523.95)
VUSB: C4.1 D1.2 P3.1 P4.3 R1.1 U2.4 | length 758.6
  Top Layer w15: U2.4 369.51,467.3 401.7,467.3 415,454 415,354.81 398.86,338.68 398.86,336.71 396.52,334.36 R1.1
  Bottom Layer w20: v1(585,385) 585,585 765,765 P4.3
  other v1: 550,385 345,495 377.51,495
pads on no net: J1.M1 J1.M2 J3.NC1 J3.NC2 P3.4 P4.2 P5.14 SW1.G1 SW1.G2 SW1.G3 SW1.G4 U1.4 Z_FDM1.1 Z_FDM2.1 Z_FDM3.1

## Polygon pours and split planes (outlines as drawn)
GND on Top Layer "GND_L01" (solid, remove dead copper, pour order 3): 0,900 0,0 2000,0 2000,900
VBAT on Top Layer "VBAT_L01" (solid, remove dead copper, pour order 1): 440,460 440,753 597,753 610,766 610,894 695,894 695,780 643,728 643,450 610,450 600,460
VUSB on Top Layer "VBUS_L01" (solid, remove dead copper, pour order 0): 170,492 285,492 342,435 395,435 395,512 170,512
GND on Bottom Layer "GND_L02" (solid, remove dead copper, pour order 4): 0,900 0,0 2000,0 2000,900
VUSB on Bottom Layer "VUSB_L02" (solid, remove dead copper, pour order 2): 650,365 320,365 282.5,402.5 282.5,512 395,512 395,420 405,410 650,410

## Keep-outs
Keep-Out Layer:
  the board outline again, w0.5

## Other copper
Top Layer:
  rectangle net VDD33: 878,158 975,178
  rectangle net VUSB: 535,365 650,410

## Silkscreen, mask and mechanical layers (free items; w line width, h text height)
Top Overlay:
  lines w5: 230,744 231,744 257,718 257,481 269,469 269,482
  text "DONE" at 1002.53,601 h50 r270
  text "-" at 382,499.5 h60
  text "+" at 470,487.82 h60
Bottom Overlay:
  circle w10: c120.06,454.42 r82
  lines w10: 62.3,398.67 175.3,511.67 ; 1397.64,424 1791.34,424 ; 1499,228.61 1499,582.94 ; 1600,228.61 1600,582.94 ; 1702,228.61 1702,582.94 ; 1397.64,228.61 1397.64,582.94 1791.34,582.94 1791.34,228.61 1397.64,228.61
  text "SSN" at 1329.34,684.4 h60 r270
  text "SCL" at 1732.29,684.4 h60 r270
  text "SDA" at 1626.57,680.07 h60 r270
  text "INTR" at 1424.83,668.8 h60 r270
  text "VBAT" at 629.32,654.94 h60 r270
  text "DONE" at 1136.06,648.87 h60 r270
  text "VUSB" at 833.66,647.14 h60 r270
  text "GPIO2" at 1533.82,630.67 h60 r270
  text "FLASH" at 1042.5,628.07 h60 r270
  text "RESET" at 1229.19,622.5 h60 r270
  text "PROGN" at 936.94,611.35 h60 r270
  text "GND" at 1431.66,441 h60 r270
  text "3.3V" at 1529.66,441 h60 r270
  text "1.8V" at 1633.69,441 h60 r270
  text "1.2V" at 1726,441 h60 r270
  text "Pb" at 177.02,407.56 h150
  text "Vision SoM / Breakout board" at 733.91,403.37 h80
  text "MISO" at 1431.69,251 h60 r270
  text "GPIO0" at 1529.66,251 h60 r270
  text "GPIO1" at 1633.66,251 h60 r270
  text "GND" at 1726.66,251 h60 r270
  text "RESET" at 234.69,110 h60 r270
  text "3.3V" at 333.66,110 h60 r270
  text "GND" at 530.66,110 h60 r270
  text "MIC_CLK" at 634.58,110 h60 r270
  text "MIC_DOUT" at 731.58,110 h60 r270
  text "MIC_WS" at 830.58,110 h60 r270
  text "SENSOR_LED" at 932.58,110 h60 r270
  text "PIX_RESET_N" at 1017.58,110 h60 r270
  text "SENSOR_INTR" at 1084.58,110 h60 r270
  text "SCK" at 1291.69,110 h60 r270
  text "MOSI" at 1344.69,110 h60 r270
OUTLINE:
  the board outline again, w5
Drill Drawing:
  drawing of 260 lines, arcs and shapes, not listed
  text "Symbol" at 953.5,2992.98 h72
  text "Count" at 1459.37,2992.98 h72
  text "Hole Size" at 2049.22,2992.98 h72
  text "Plated" at 3198.88,2992.98 h72
  text "Hole Type" at 3704.76,2992.98 h72
  text "Drill Layer Pair" at 4438.56,2992.98 h72
  text "Via/Pad" at 5938.11,2992.98 h72
  text "Pad Shape" at 6527.96,2992.98 h72
  text "93" at 1459.37,2842.98 h60
  text "12.00mil (0.305mm)" at 2049.22,2842.98 h60
  text "PTH" at 3198.88,2842.98 h60
  text "Round" at 3704.76,2842.98 h60
  text "Top Layer - Bottom Layer" at 4438.56,2842.98 h60
  text "Via" at 5938.11,2842.98 h60
  text "Rounded" at 6527.96,2842.98 h60
  text "2" at 1459.37,2692.98 h60
  text "23.62mil (0.600mm)" at 2049.22,2692.98 h60
  text "PTH" at 3198.88,2692.98 h60
  text "Slot" at 3704.76,2692.98 h60
  text "Top Layer - Bottom Layer" at 4438.56,2692.98 h60
  text "Pad" at 5938.11,2692.98 h60
  text "Rounded Rectangle" at 6527.96,2692.98 h60
  text "2" at 1459.37,2542.98 h60
  text "25.59mil (0.650mm)" at 2049.22,2542.98 h60
  text "PTH" at 3198.88,2542.98 h60
  text "Slot" at 3704.76,2542.98 h60
  text "Top Layer - Bottom Layer" at 4438.56,2542.98 h60
  text "Pad" at 5938.11,2542.98 h60
  text "Rounded" at 6527.96,2542.98 h60
  text "32" at 1459.37,2392.98 h60
  text "35.43mil (0.900mm)" at 2049.22,2392.98 h60
  text "PTH" at 3198.88,2392.98 h60
  text "Round" at 3704.76,2392.98 h60
  text "Top Layer - Bottom Layer" at 4438.56,2392.98 h60
  text "Pad" at 5938.11,2392.98 h60
  text "(Mixed)" at 6527.96,2392.98 h60
  text "2" at 1459.37,2242.98 h60
  text "86.61mil (2.200mm)" at 2049.22,2242.98 h60
  text "PTH" at 3198.88,2242.98 h60
  text "Round" at 3704.76,2242.98 h60
  text "Top Layer - Bottom Layer" at 4438.56,2242.98 h60
  text "Pad" at 5938.11,2242.98 h60
  text "Rounded" at 6527.96,2242.98 h60
  text "4" at 1459.37,2092.98 h60
  text "100.00mil (2.540mm)" at 2049.22,2092.98 h60
  text "PTH" at 3198.88,2092.98 h60
  text "Round" at 3704.76,2092.98 h60
  text "Top Layer - Bottom Layer" at 4438.56,2092.98 h60
  text "Pad" at 5938.11,2092.98 h60
  text "Rounded" at 6527.96,2092.98 h60
  text "135 Total" at 1459.37,1942.98 h60
  text "Slot definitions :" at 953.5,1798.01 h60
  text "Routed Path Length" at 1986.19,1798.01 h60
  text "= Calculated from tool start centre position to tool end centre position." at 3088.85,1798.01 h60
  text "Hole Length" at 1986.19,1698.03 h60
  text "= Routed Path Length + Tool Size = Slot length as defined in the PCB layout" at 2678.98,1698.03 h60
  text "Layer" at 3178.77,882.68 h60
  text "Name" at 3588.68,882.68 h60
  text "Material" at 4518.43,882.68 h60
  text "Thickness" at 5378.19,882.68 h60
  text "Constant" at 6028.03,882.68 h60
  text "Board Layer Stack" at 6597.89,882.68 h60
  text "Top Overlay" at 3588.68,762.68 h60
  text "Top Solder" at 3588.68,642.68 h60
  text "Solder Resist" at 4518.43,642.68 h60
  text "0.40mil" at 5378.19,642.68 h60
  text "3.5" at 6028.03,642.68 h60
  text "1" at 3178.77,522.68 h60
  text "Top Layer" at 3588.68,522.68 h60
  text "Copper" at 4518.43,522.68 h60
  text "1.40mil" at 5378.19,522.68 h60
  text "Dielectric 1" at 3588.68,402.68 h60
  text "FR-4" at 4518.43,402.68 h60
  text "59.06mil" at 5378.19,402.68 h60
  text "4.8" at 6028.03,402.68 h60
  text "2" at 3178.77,282.68 h60
  text "Bottom Layer" at 3588.68,282.68 h60
  text "Copper" at 4518.43,282.68 h60
  text "1.40mil" at 5378.19,282.68 h60
  text "Bottom Solder" at 3588.68,162.68 h60
  text "Solder Resist" at 4518.43,162.68 h60
  text "0.40mil" at 5378.19,162.68 h60
  text "3.5" at 6028.03,162.68 h60
  text "Bottom Overlay" at 3588.68,42.68 h60